# Altium PCB Digital_Voltimeter.PcbDoc
Units mil, origin at the board's own origin, x right, y up, seen from the top; angles counter-clockwise.
Board outline 5250 x 3590 mil, 2 copper layers (Top Layer, Bottom Layer); 14 components, 18 nets, 87 pads, 3 vias.
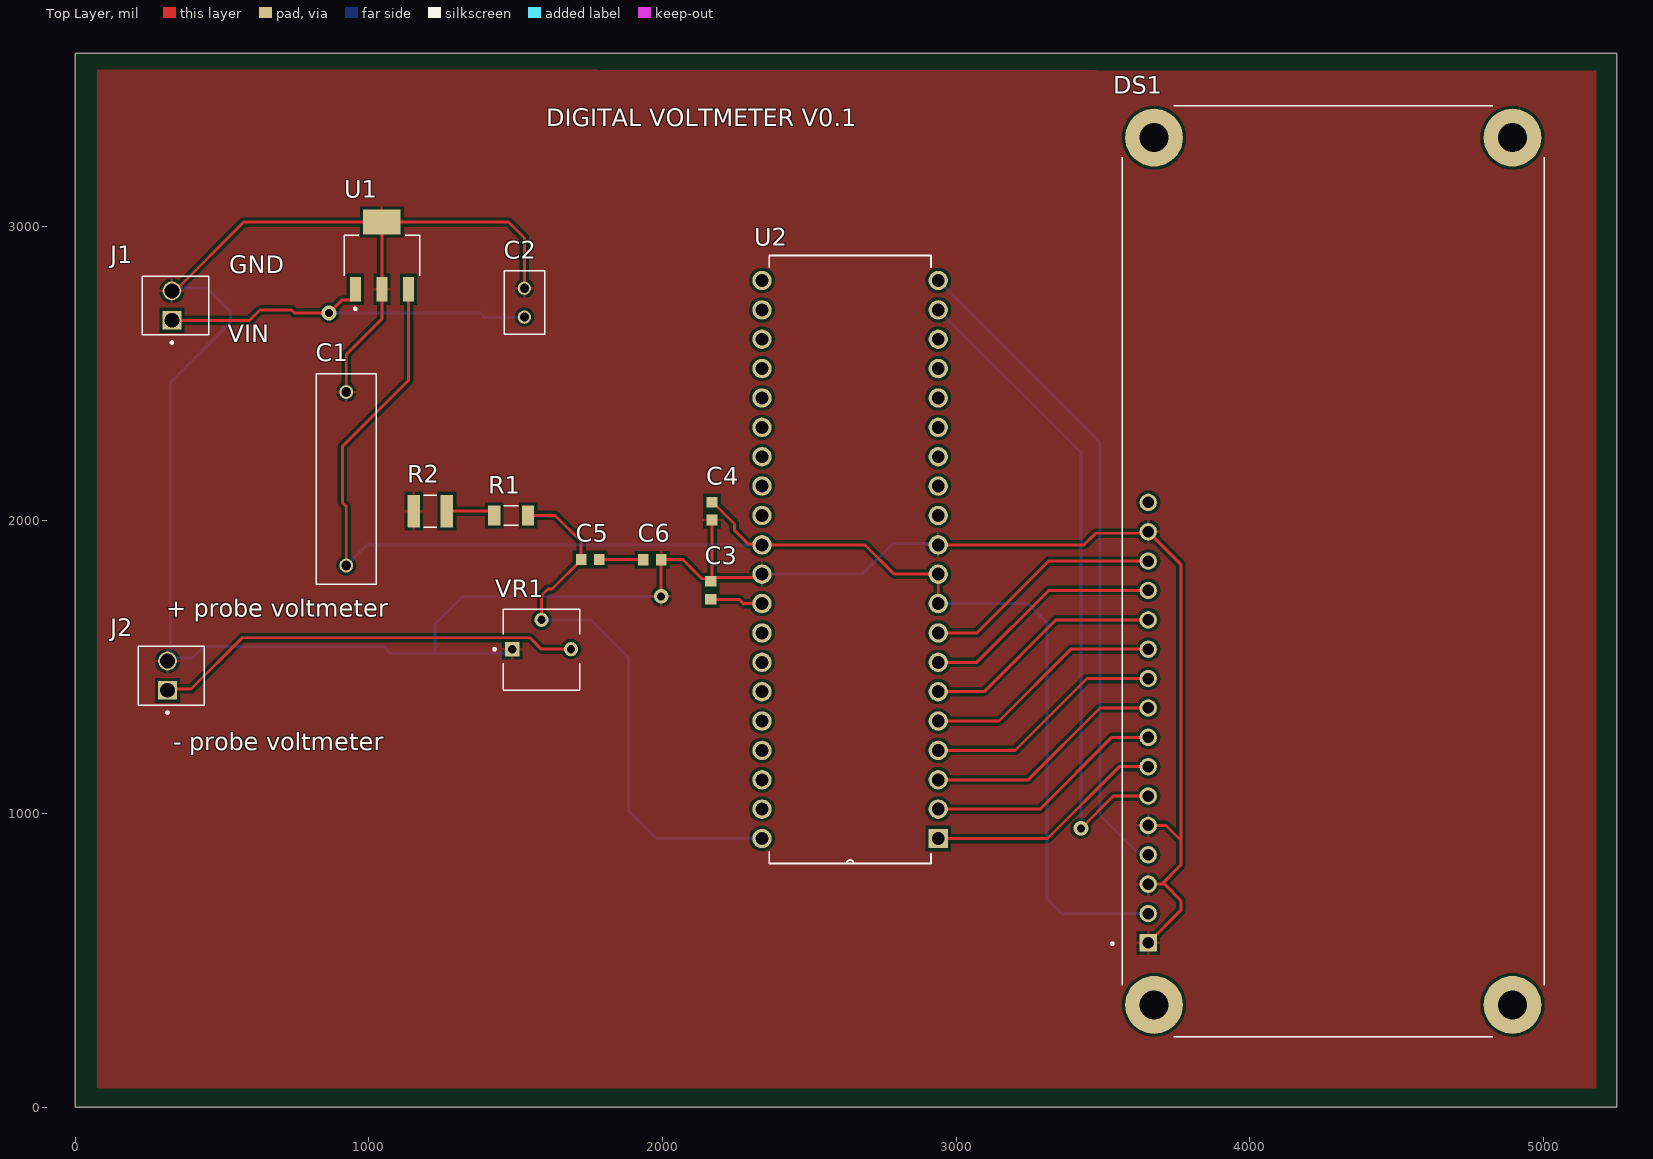
[diagram p0: Top Layer view]
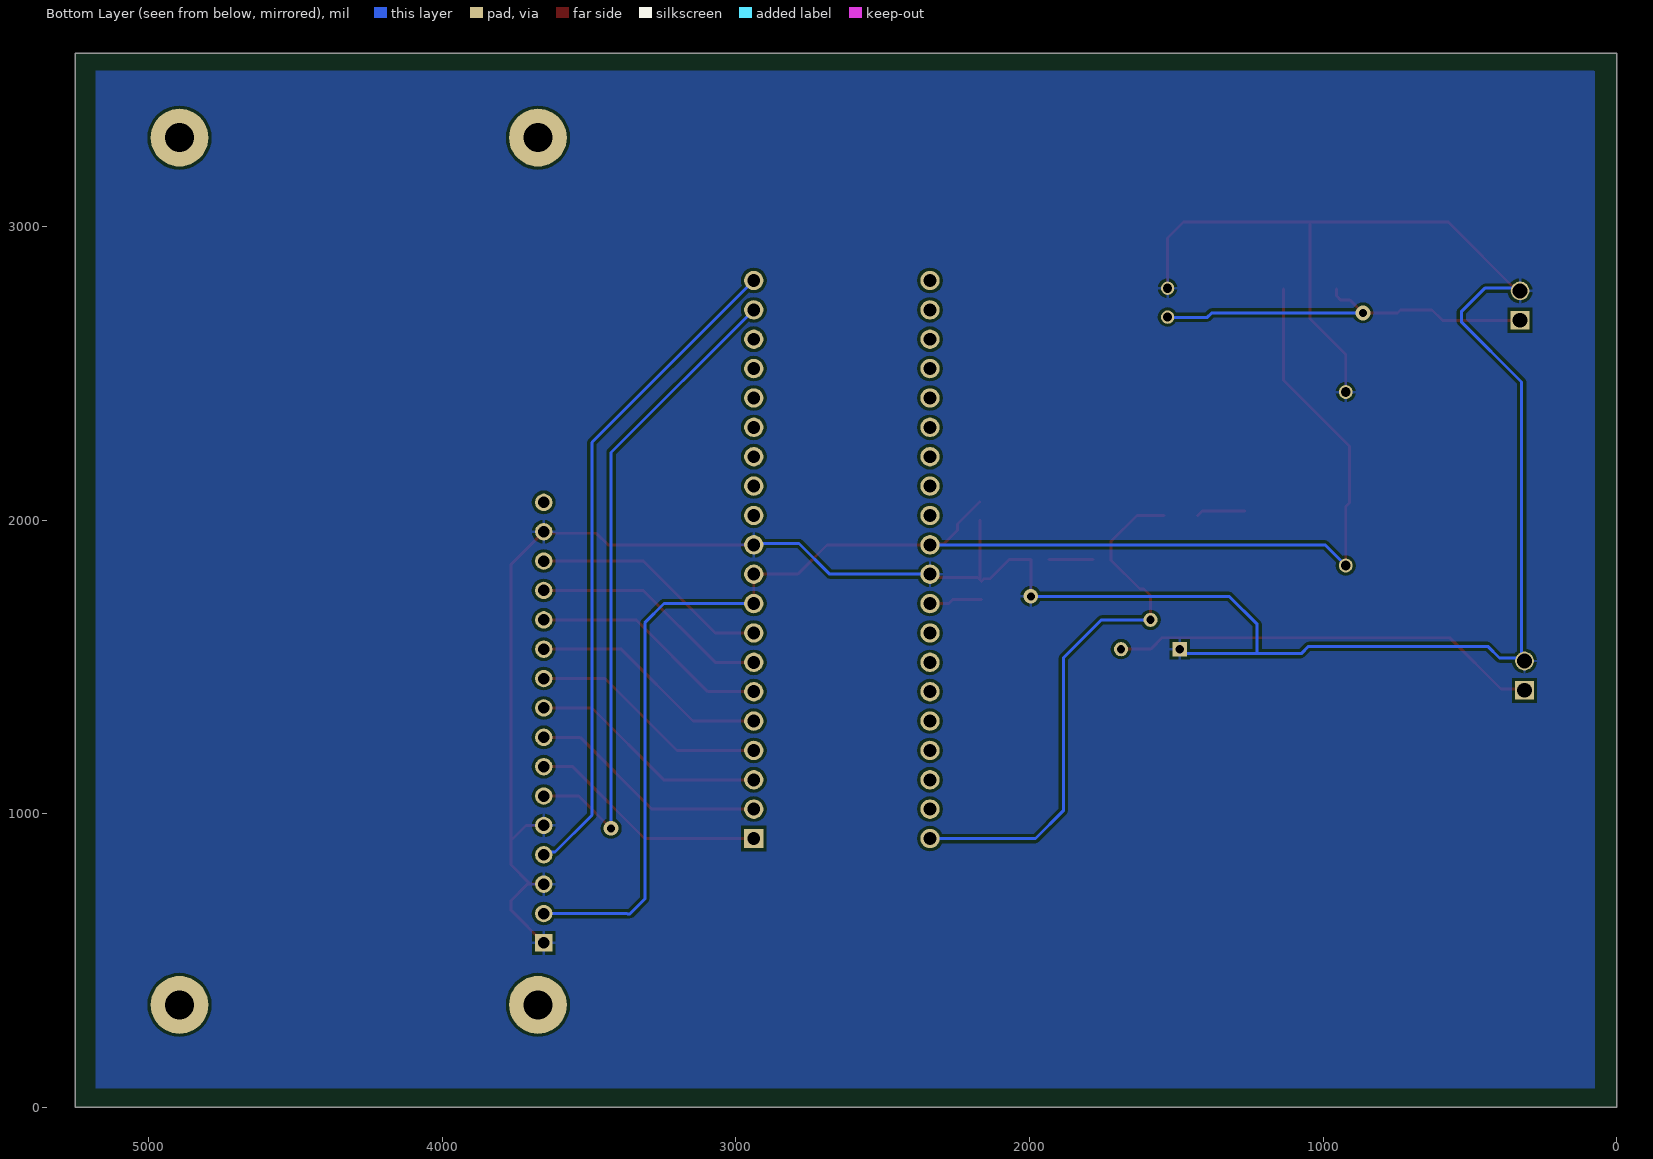
[diagram p1: Bottom Layer view, seen from below]

## Layer stack, top to bottom
Top Solder: solder mask 0.4, Solder Resist, Dk 3.5
Top Layer: signal copper 1.4
Dielectric 1: dielectric 12.6, FR-4, Dk 4.8
Bottom Layer: signal copper 1.4
Bottom Solder: solder mask 0.4, Solder Resist, Dk 3.5

## Board outline
0,0 0,3590 5250,3590 5250,0

## Design rules (kind name [scope] priority, off if disabled: settings)
Clearance [All] p1: gap=10 ignorepadtopadclearanceinfootprint=FALSE except(0: Arc-Hole Track-Hole SMDPad-Hole THPad-Hole Via-Hole Fill-Hole Poly-Hole Region-Hole Text-Hole)
PolygonConnect [All] p1: connectstyle=Relief reliefconductorwidth=10 reliefentries=4 polygonreliefangle="90 Angle" airgapwidth=10
RoutingVias [All] p1: holewidth=28 width=50 viastyle="Through Hole" minholewidth=28 minwidth=50 maxholewidth=28 maxwidth=50
SolderMaskExpansion [All] p1: expansion=4
Width [All] p1: maxlimit=10 minlimit=10 preferedwidth=10
30 further rules are at their usual default settings.

## Components (designator, comment, footprint, x,y, rotation, side; value= is the part's Value field where it differs from the comment)
C1 "0.1uF" CAPRR1500W60L1820T520H1540 923.5,2140.2 r90 top
C2 "0.33uF" CAPRB250W50L550T350H600 1530,2740 r90 top
C3 "100nF" CAPC1608X90N 2164.01,1760.47 r270 top
C4 "100nF" CAPC1608X90N 2169.01,2030.47 r90 top
C5 "100nF" CAPC1608X90N 1754.01,1865.47 r0 top
C6 "100nF" CAPC1608X90N 1965,1865 r0 top
DS1 "RC1602B-BIW-CSV" LCD_RC1602B-BIW-CSV 4284.01,1825.47 r90 top
J1 "640454-2" TE_640454-2 330,2680 r90 top
J2 "640454-2" TE_640454-2 315,1420 r90 top
R1 "10KR" RESC3115X65N 1485,2015.47 r0 top
R2 "2k2R" RESC3126X65N 1210,2030 r0 top
U1 "LM7805MP/NOPB" VREG_LM7805MP/NOPB 1045,2900 r90 top
U2 "ATMEGA32A-PU" DIP254P1524X482-40 2339.01,2815.47 r180 top
VR1 "1KR" TRIM_3362P-1-253LF 1588.5,1560.12 r0 top

## Footprints (in the part's own frame and the unit in brackets; to place one, negate y for a bottom-side part, rotate by r counter-clockwise, add the part's x,y. Pads: shape width x height; smd on the part's side, far side on the other; paste and mask are expansions set on the pad)
CAPC1608X90N [mm]
  rect 0.92x0.98 smd: 1(-0.775,0) 2(0.775,0)
CAPRB250W50L550T350H600 [mm]
  round 1.15 hole 0.8: 1(-1.25,0) 2(1.25,0)
  silkscreen extent -2.75,-1.75 2.75,1.75, body extent -2.75,-1.75 2.75,1.75, height 3
CAPRR1500W60L1820T520H1540 [mm]
  round 1.2 hole 0.85: 1(-7.5,0) 2(7.5,0)
  silkscreen extent -9.1,-2.6 9.1,2.6
DIP254P1524X482-40 [mil]
  rect 66x66 / inner round 66 / far side rect 66x66 hole 44: 1(-600,1900)
  round 66 hole 44: 2(-600,1800) 3(-600,1700) 4(-600,1600) 5(-600,1500) 6(-600,1400) 7(-600,1300) 8(-600,1200) 9(-600,1100) 10(-600,1000) 11(-600,900) 12(-600,800) 13(-600,700) 14(-600,600) 15(-600,500) 16(-600,400) 17(-600,300) 18(-600,200) 19(-600,100) 20(-600,0) 21(0,0) 22(0,100) 23(0,200) 24(0,300) 25(0,400) 26(0,500) 27(0,600) 28(0,700) 29(0,800) 30(0,900) 31(0,1000) 32(0,1100) 33(0,1200) 34(0,1300) 35(0,1400) 36(0,1500) 37(0,1600) 38(0,1700) 39(0,1800) 40(0,1900)
  silkscreen extent -575,-85 -25,1985, body extent -630,-75 20,1985, height 190
LCD_RC1602B-BIW-CSV [mm]
  rect 1.508x1.508 / inner round 1.508 / far side rect 1.508x1.508 hole 1: 1(-32.14,16)
  round 1.508 hole 1: 2(-29.6,16) 3(-27.06,16) 4(-24.52,16) 5(-21.98,16) 6(-19.44,16) 7(-16.9,16) 8(-14.36,16) 9(-11.82,16) 10(-9.28,16) 11(-6.74,16) 12(-4.2,16) 13(-1.66,16) 14(0.88,16) 15(3.42,16) 16(5.96,16)
  round 5 hole 2.5: S1(-37.5,15.5) S2(37.5,15.5) S3(37.5,-15.5) S4(-37.5,-15.5)
  silkscreen extent -40.25,-18.25 40.25,19.2, body extent -40,-18 40,18, height 8.9
RESC3115X65N [mm]
  rect 1.05x1.72 smd: 1(-1.46,0) 2(1.46,0)
  silkscreen extent -0.62,-0.85 0.62,0.85
RESC3126X65N [mm]
  rect 1.07x2.82 smd: 1(-1.43,0) 2(1.43,0)
  silkscreen extent -0.57,-1.4 0.57,1.4
TE_640454-2 [mm]
  rect 1.62x1.62 / inner round 1.62 / far side rect 1.62x1.62 hole 1.27: 1(0,0)
  round 1.62 hole 1.27: 2(2.54,0)
  silkscreen extent -2.02,-3.17 3.81,2.55
TRIM_3362P-1-253LF [mil]
  rect 48.11x48.11 / inner round 48.11 / far side rect 48.11x48.11 hole 28.11: 1(-100,0)
  round 48.11 hole 28.11: 2(0,100) 3(100,0)
  silkscreen extent -164,-139 130,137, body extent -130,-138 130,138, height 192
VREG_LM7805MP/NOPB [mm]
  rect 2.15x0.95 smd: 1(-2.9,2.3) 2(-2.9,0) 3(-2.9,-2.3)
  rect 2.15x3.25 smd: 4(2.9,0)
  silkscreen extent -4.7,-3.25 1.75,3.25, body extent -3.5,-3.25 3.5,3.25, height 1.8

## Part data
C1: library part ECWFA2J104JQ, Package=None, Availability=Unavailable, MP=ECWFA2J104JQ, Price=None
C2: library part FA16X8R2A334KRU00, "0.33 µF ±10% 100V Ceramic Capacitor X8R Radial", Package="Radial TDK", Availability="In Stock", Check_prices=https://www.snapeda.com/parts/FA16X8R2A334KRU00/TDK/view-part/?ref=eda, MF=TDK, MP=FA16X8R2A334KRU00, Price=None, Purchase-URL=https://pricing.snapeda.com/search/part/FA16X8R2A334KRU00/?ref=eda, SnapEDA_Link=https://www.snapeda.com/parts/FA16X8R2A334KRU00/TDK/view-part/?ref=snap
C3 C4 C5 C6: library part 0603YC104KAZ2A, "CERAMIC CAPACITOR, 0.1UF, 16V, X7R, 10%, 0603, FULL REEL", Package=None, Availability=Unavailable, MP=0603YC104KAZ2A, Price=None
DS1: "Display: LCD; alphanumeric; STN Negative; 16x2; blue; LED; PIN: 16", Package=None, Availability="Not in stock", Check_prices=https://www.snapeda.com/parts/RC1602B-BIW-CSV/Raystar/view-part/?ref=eda, MF=Raystar, MP=RC1602B-BIW-CSV, Price=None, SnapEDA_Link=https://www.snapeda.com/parts/RC1602B-BIW-CSV/Raystar/view-part/?ref=snap
J1 J2: "02P MTA100 HDR ASSY SQ STR POL", Package=None, Availability="In Stock", Check_prices=https://www.snapeda.com/parts/640454-2/TE+Connectivity+AMP+Connectors/view-part/?ref=eda, EU_RoHS_Compliance=Compliant, MF="TE Connectivity", MP=640454-2, Price=None, Purchase-URL=https://pricing.snapeda.com/search/part/640454-2/?ref=eda, SnapEDA_Link=https://www.snapeda.com/parts/640454-2/TE+Connectivity+AMP+Connectors/view-part/?ref=snap
R1: library part CRGCQ1206J10K, "Fixed Resistor CRGCQ 1206 10K 5%", Package="3115 TE Connectivity", Availability=Warning, DigiKey-Purchase-URL=https://snapeda.com/shop?store=DigiKey&id=3188341, MF="TE Connectivity", Mouser-Purchase-URL=https://snapeda.com/shop?store=Mouser&id=3188341, MP=CRGCQ1206J10K, Price=None, SnapEDA_Link=https://www.snapeda.com/parts/CRGCQ1206J10K/TE%20Connectivity/view-part/3188341/?ref=snap
R2: library part CRGCQ1210J2K2, "Fixed Resistor CRGCQ 1210 2K2 5%", Package=None, Availability=Unavailable, MP=CRGCQ1210J2K2, Price=None
U1: "1.5-A, 30-V, linear voltage regulator", Package="SOT-223-4 Texas Instruments", Availability="In Stock", Check_prices=https://www.snapeda.com/parts/LM7805MP/NOPB/Texas+Instruments/view-part/?ref=eda, MF="Texas Instruments", MP=LM7805MP/NOPB, Price=None, Purchase-URL=https://pricing.snapeda.com/search/part/LM7805MP/NOPB/?ref=eda, SnapEDA_Link=https://www.snapeda.com/parts/LM7805MP/NOPB/Texas+Instruments/view-part/?ref=snap
U2: "AVR AVR® ATmega Microcontroller IC 8-Bit 16MHz 32KB (16K x 16) FLASH 40-PDIP", Package="PDIP-40 Microchip", Availability="In Stock", Check_prices=https://www.snapeda.com/parts/ATMEGA32A-PU/Microchip/view-part/?ref=eda, MF=Microchip, MP=ATMEGA32A-PU, Price=None, Purchase-URL=https://pricing.snapeda.com/search/part/ATMEGA32A-PU/?ref=eda, SnapEDA_Link=https://www.snapeda.com/parts/ATMEGA32A-PU/Microchip/view-part/?ref=snap
VR1: library part 3362P-1-253LF, "25 kOhms 0.5W, 1/2W PC Pins Through Hole Trimmer Potentiometer Cermet 1.0 Turn Top Adjustment", Package="3362P-1 Bourns Inc.", Availability="In Stock", Check_prices=https://www.snapeda.com/parts/3362P-1-253LF/Bourns/view-part/?ref=eda, MF=Bourns, MP=3362P-1-253LF, Price=None, Purchase-URL=https://pricing.snapeda.com/search/part/3362P-1-253LF/?ref=eda, SnapEDA_Link=https://www.snapeda.com/parts/3362P-1-253LF/Bourns/view-part/?ref=snap

## Via types
v1: diameter 50, hole 28, Top Layer to Bottom Layer, 3 vias

## Nets (pads, with @x,y where several pads share a name; then routed paths per layer and width w, separated by ;. In a path a pad name is that pad's centre, name@x,y a point inside that pad or via, vN(x,y) a via of type N, cw(c..) or ccw(c..) an arc to the next point about the centre after c; other vN are vias at no path point)
ADC_INPUT: C5.1 R1.2 U2.40 VR1.2 | length 1911.6
  Top Layer w10: R1.2 1634.53,2015.47 1723.5,1926.5 C5.1 1723.5,1864.29 1624.21,1765 1610.86,1765 1588.5,1742.64 VR1.2
  Bottom Layer w10: VR1.2 1755,1660.12 1885,1530.12 1885,1010 1979.53,915.47 U2.40
D0: DS1.7 U2.1 | length 816.4
  Top Layer w10: U2.1 3310.59,915.47 3555.24,1160.12 DS1.7
D1: DS1.8 U2.2 | length 816.4
  Top Layer w10: U2.2 3285.35,1015.47 3530,1260.12 DS1.8
D2: DS1.9 U2.3 | length 816.4
  Top Layer w10: U2.3 3245.47,1115.47 3490.12,1360.12 DS1.9
D3: DS1.10 U2.4 | length 816.4
  Top Layer w10: U2.4 3200.47,1215.47 3445.12,1460.12 DS1.10
D4: DS1.11 U2.5 | length 816.4
  Top Layer w10: U2.5 3145.47,1315.47 3390.12,1560.12 DS1.11
D5: DS1.12 U2.6 | length 816.4
  Top Layer w10: U2.6 3095.47,1415.47 3340.12,1660.12 DS1.12
D6: DS1.13 U2.7 | length 816.4
  Top Layer w10: U2.7 3070.47,1515.47 3315.12,1760.12 DS1.13
D7: DS1.14 U2.8 | length 816.4
  Top Layer w10: U2.8 3070.47,1615.47 3315.12,1860.12 DS1.14
E: DS1.6 U2.19 | length 2241.5
  Top Layer w10: v1(3425,950) 3535.12,1060.12 DS1.6
  Bottom Layer w10: U2.19 3425,2229.48 v1(3425,950)
GND: C1.2 C2.2 C3.1 C4.1 C6.2 DS1.1 DS1.3 DS1.5 DS1.15 J1.2 J2.2 R2.1 U1.2 U1.4 U2.11 U2.31 VR1.1 | length 9585.8
  Top Layer w10: J1.2@340,2780 574.17,3014.17 U1.4 ; C1.2 923.5,2563.5 1045,2685 U1.2 U1.4 ; C2.2 1530,2960 1475.83,3014.17 U1.4 ; v1(1995.51,1740) C6.2 2070,1865 2135,1800 2155,1800 C3.1 C3.1@2169.01,1795.98 ; C4.1 C3.1@2169.01,1795.98 ; U2.31 2323.86,1815.47 2312.48,1804.09 2177.12,1804.09 C3.1@2169.01,1795.98 ; U2.11 3435.47,1915.47 3475,1955 3648.97,1955 DS1.15 3765,1849.21 3765,825 3700.12,760.12 DS1.3 3654.21,760 3710,760 3765,705 3765,671.03 DS1.1 ; DS1.5 3714.88,960.12 3762.5,912.5
  Bottom Layer w10: J2.2 J2.2@325,1530 ; J1.2@335,2789.21 450,2789.21 530,2709.21 530,2675 325,2470 J2.2@325,1530 ; VR1.1 1473.38,1545 1225,1545 ; v1(1995.51,1740) 1320,1740 1225,1645 1225,1545 ; U2.31 2680.47,1815.47 2785,1920 2934.48,1920 U2.11 ; J2.2@325,1530 400,1530 440,1570 1050,1570 1075,1545 1225,1545
NetC3_2: C3.2 U2.32 | length 181
  Top Layer w10: C3.2 2260.51,1729.96 2275,1715.47 U2.32
NetC5_2: C5.2 C6.1 | length 150.2
  Top Layer w10: C5.2 1934.02,1865.47 C6.1
NetR1_1: R1.1 R2.2 | length 167.2
  Top Layer w10: R2.2 1412.99,2030 R1.1
POS_VOLTIMETER: J2.1 VR1.3 | length 1471.8
  Top Layer w10: J2.1@305,1425 395,1425 569.17,1599.17 1548.68,1599.17 1587.74,1560.12 VR1.3
RS: DS1.4 U2.20 | length 2268.7
  Bottom Layer w10: U2.20 3490,2264.48 3490,995 3615.44,869.56 3644.64,869.56 DS1.4
VCC: C1.1 C4.2 DS1.2 U1.3 U2.9 U2.10 U2.30 | length 5172.4
  Top Layer w10: C1.1 923.5,2045.75 910,2059.25 910,2250 1135.55,2475.55 U1.3 ; C4.2 2170.19,2060.98 2245,1986.18 2245,1965 2291.01,1918.99 2335.5,1918.99 U2.30 2599.53,1915.47 2600,1915 2690,1915 2789.53,1815.47 U2.10 U2.9
  Bottom Layer w10: C1.1 994.05,1915.47 U2.30 ; U2.9 3244.53,1715.47 3310,1650 3310,710 3360.86,659.14 3369.14,659.14 3370.12,660.12 DS1.2
VIN: C2.1 J1.1 U1.1 | length 1352.3
  Top Layer w10: J1.1@340,2680 594.53,2680 630,2715.47 736.85,2715.47 747.32,2705 v1(865,2705) 908.5,2748.5 940.75,2748.5 954.45,2762.2 U1.1
  Bottom Layer w10: v1(865,2705) 1380,2705 1395,2690 1529.21,2690 C2.1
pads on no net: DS1.16 DS1.S1 DS1.S2 DS1.S3 DS1.S4 U2.12 U2.13 U2.14 U2.15 U2.16 U2.17 U2.18 U2.21 U2.22 U2.23 U2.24 U2.25 U2.26 U2.27 U2.28 U2.29 U2.33 U2.34 U2.35 U2.36 U2.37 U2.38 U2.39

## Polygon pours and split planes (outlines as drawn)
no net on Top Overlay (solid): 810,2335
GND on Top Layer (solid, pour order 14): 75,3534.97 75,65 5180,65 5180,3529.95
no net on Top Layer "Top Layer-No Net" (solid, pour order 12): 855,1205
no net on Top Layer "Top Layer-No Net 1" (solid, pour order 10): 1260,625
GND on Bottom Layer "Bottom GND plane" (solid, pour order 16): 75,3534.97 75,65 5180,65 5180,3529.95 80.01,3529.95

## Silkscreen, mask and mechanical layers (free items; w line width, h text height)
Top Overlay:
  text "DIGITAL VOLTMETER V0.1" at 1605,3340 h60
  text "GND" at 525,2840 h60
  text "VIN" at 520,2604.41 h60
  text "+ probe voltmeter" at 310,1670 h60
  text "- probe voltmeter" at 335,1215.47 h60
Mechanical 1:
  the board outline again, w10